# Altium PCB PCB1.PcbDoc
Units mil, origin at the board's own origin, x right, y up, seen from the top; angles counter-clockwise.
Board outline 395 x 2550 mil, 2 copper layers (Top Layer, Bottom Layer); 3 components, 5 nets, 30 pads, 0 vias.
Unrouted connection lines stored in the file: 5.
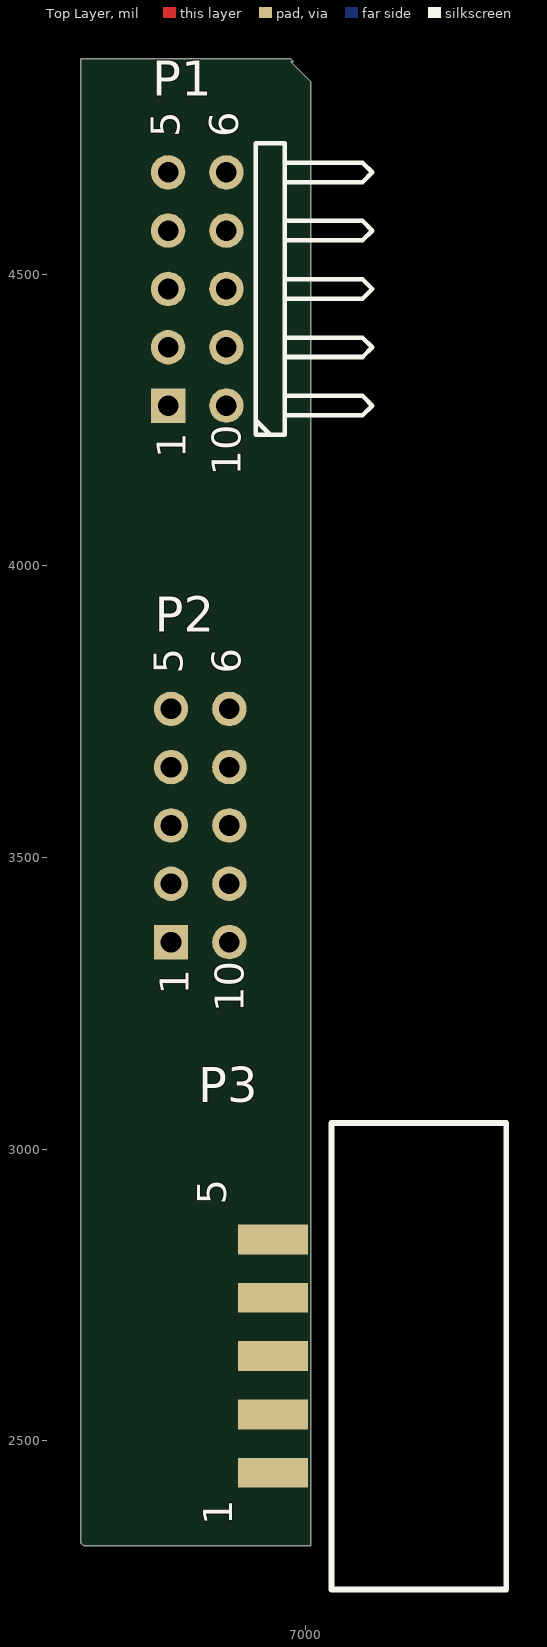
[diagram p0: Top Layer view]
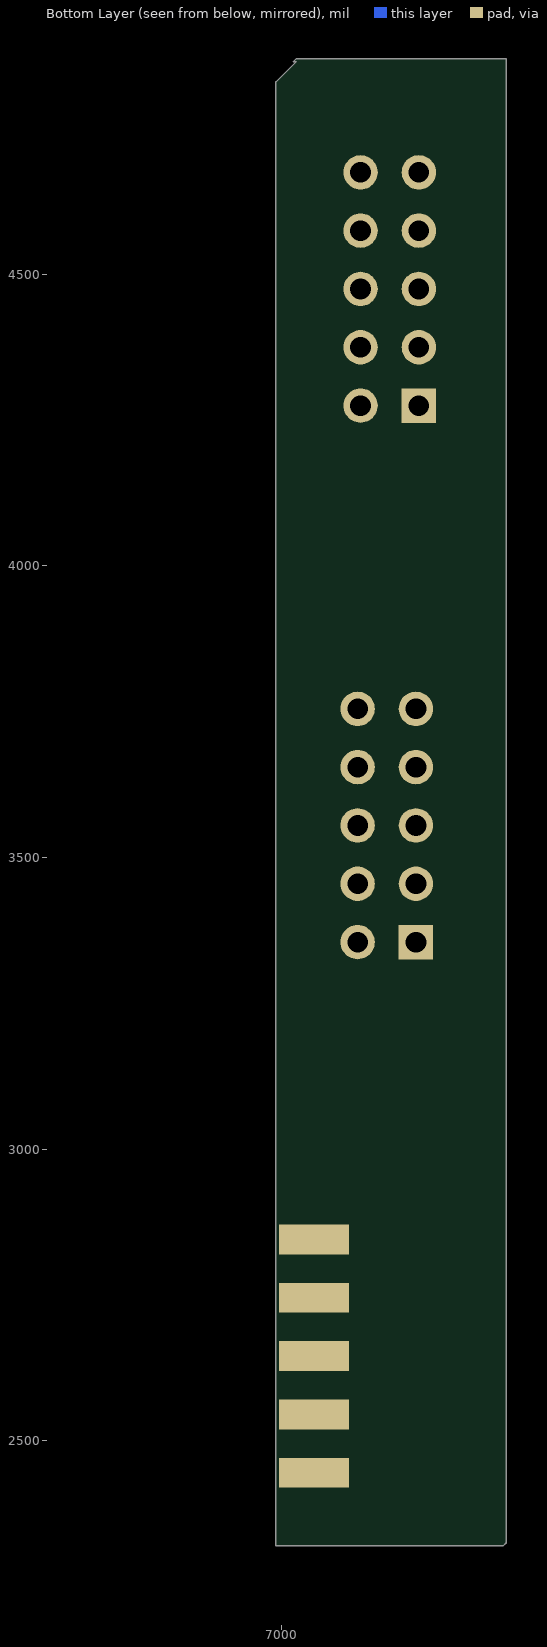
[diagram p1: Bottom Layer view, seen from below]

## Layer stack, top to bottom
Top Layer: signal copper 1.4
Dielectric: dielectric 12.6, FR-4, Dk 4.8
Bottom Layer: signal copper 1.4

## Board outline
6980,4865 6975,4870 6615,4870 6615,2325 6620,2320 7010,2320 7010,4830 6975,4865

## Design rules (kind name [scope] priority, off if disabled: settings)
Clearance [All] p1: gap=10
PolygonConnect [All] p1: connectstyle=Relief reliefconductorwidth=10 reliefentries=4 polygonreliefangle="90 Angle" airgapwidth=10
RoutingVias [All] p1: holewidth=28 width=50 viastyle="Through Hole" minholewidth=28 minwidth=50 maxholewidth=28 maxwidth=50
SolderMaskExpansion [All] p1: expansion=4
Width [All] p1: maxlimit=10 minlimit=10 preferedwidth=10
28 further rules are at their usual default settings.

## Classes and differential pairs
component class SchemaCentrale: P1 P3

## Components (designator, comment, footprint, x,y, rotation, side; value= is the part's Value field where it differs from the comment)
P1 "Header 5X2" HEADER10COUDE 6865,4275 r90 top
P2 "Header 5X2H" HEADERDROIT 6870,3355 r90 top
P3 "Header 5X2H" HEADERACHEVAL 6945,2445 r90 top

## Footprints (in the part's own frame and the unit in brackets; to place one, negate y for a bottom-side part, rotate by r counter-clockwise, add the part's x,y. Pads: shape width x height; smd on the part's side, far side on the other; paste and mask are expansions set on the pad)
HEADER10COUDE [mm]
  rect 1.5x1.5 hole 0.9: 1(0,2.54)
  round 1.5 hole 0.9: 2(2.54,2.54) 3(5.08,2.54) 4(7.62,2.54) 5(10.16,2.54) 6(10.16,0) 7(7.62,0) 8(5.08,0) 9(2.54,0) 10(0,0)
  silkscreen extent -1.27,-6.35 11.43,-1.27, body extent -2.43,-7.24 12.74,3.51, height 5.36
HEADERACHEVAL [mil]
  rect 51.18x120 smd: 1(0,0) 2(100,0) 3(200,0) 4(300,0) 5(400,0)
  rect 51.18x120 smd far side: 6(400,0) 7(300,0) 8(200,0) 9(100,0) 10(0,0)
  silkscreen extent -200,-400 600,-100, body extent -97,-319 501,25, height 82
HEADERDROIT [mm]
  rect 1.5x1.5 hole 0.9: 1(0,2.54)
  round 1.5 hole 0.9: 2(2.54,2.54) 3(5.08,2.54) 4(7.62,2.54) 5(10.16,2.54) 6(10.16,0) 7(7.62,0) 8(5.08,0) 9(2.54,0) 10(0,0)
  body extent -2.41,-1.16 12.76,3.44, height 6.44

## Part data
P1: "Header, 5-Pin, Dual row"
P2 P3: "Header, 5-Pin, Dual row, Right Angle"

## Nets (pads, with @x,y where several pads share a name; then routed paths per layer and width w, separated by ;. In a path a pad name is that pad's centre, name@x,y a point inside that pad or via, vN(x,y) a via of type N, cw(c..) or ccw(c..) an arc to the next point about the centre after c; other vN are vias at no path point)
5V: P1.8 P2.8
12V: P1.6 P2.6
GND: P1.10 P2.10
RXI: P1.2 P2.2
TXO: P1.4 P2.4
pads on no net: P1.1 P1.3 P1.5 P1.7 P1.9 P2.1 P2.3 P2.5 P2.7 P2.9 P3.1 P3.2 P3.3 P3.4 P3.5 P3.6 P3.7 P3.8 P3.9 P3.10

## Text inside footprints (layer, text, board x,y; h text height)
P1: Top Overlay "10" at 6890,4155 h50 r90; Top Overlay "1" at 6795,4185 h50 r90; Top Overlay "6" at 6885,4735 h50 r90; Top Overlay "5" at 6785,4735 h50 r90
P2: Top Overlay "10" at 6895,3235 h50 r90; Top Overlay "1" at 6800,3265 h50 r90; Top Overlay "6" at 6890,3815 h50 r90; Top Overlay "5" at 6790,3815 h50 r90
P3: Top Overlay "5" at 6865,2905 h50 r90; Top Overlay "1" at 6875,2355 h50 r90